# EAGLE board CONTROL PROJECT (EAGLE 9.6.2)
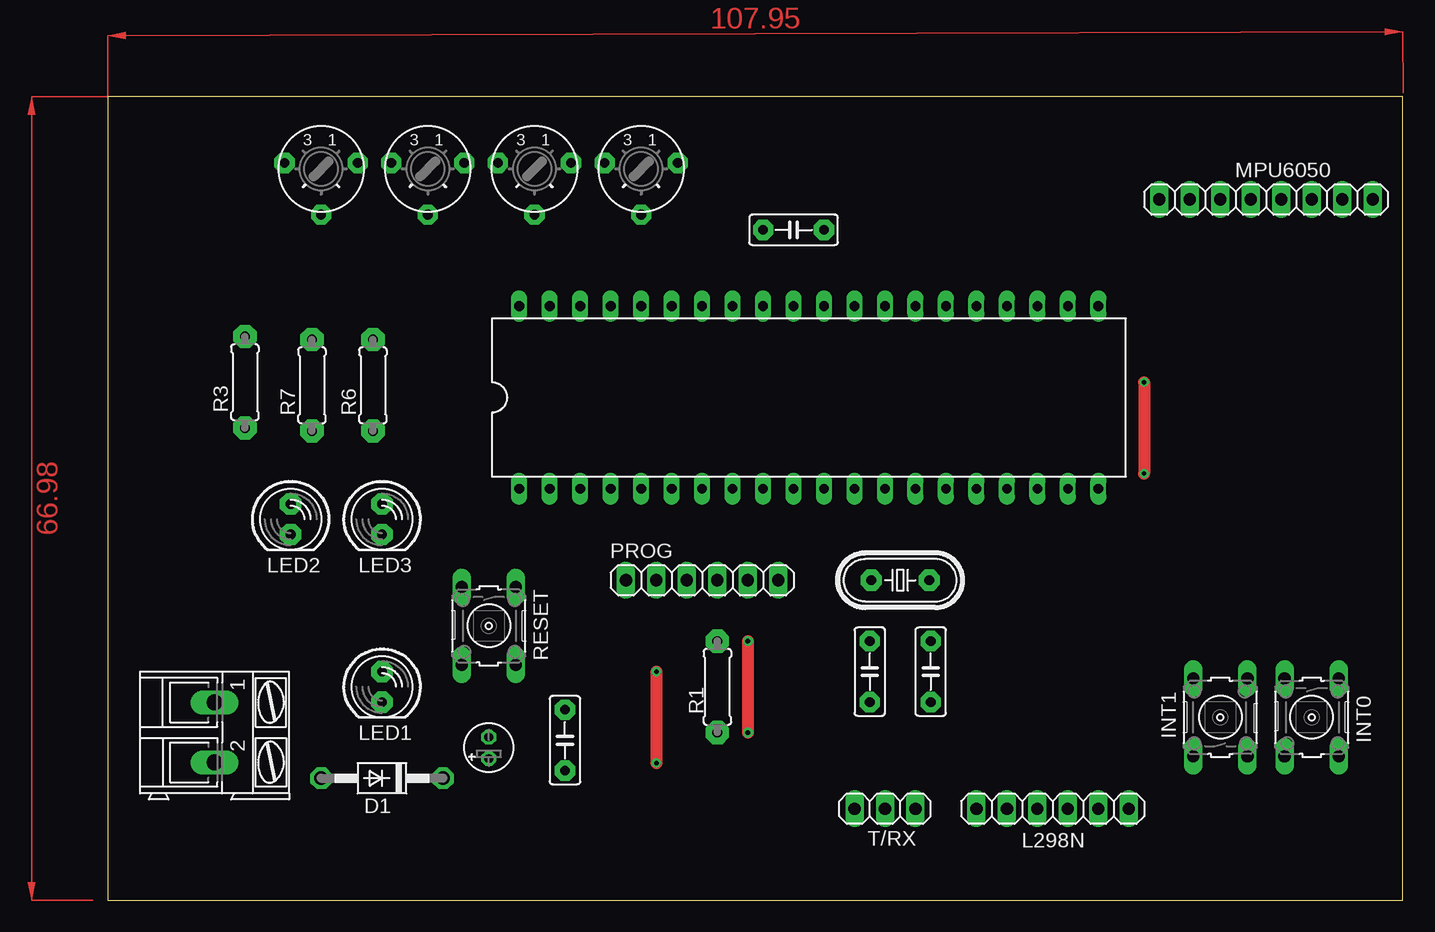
[diagram p0: board, top side]
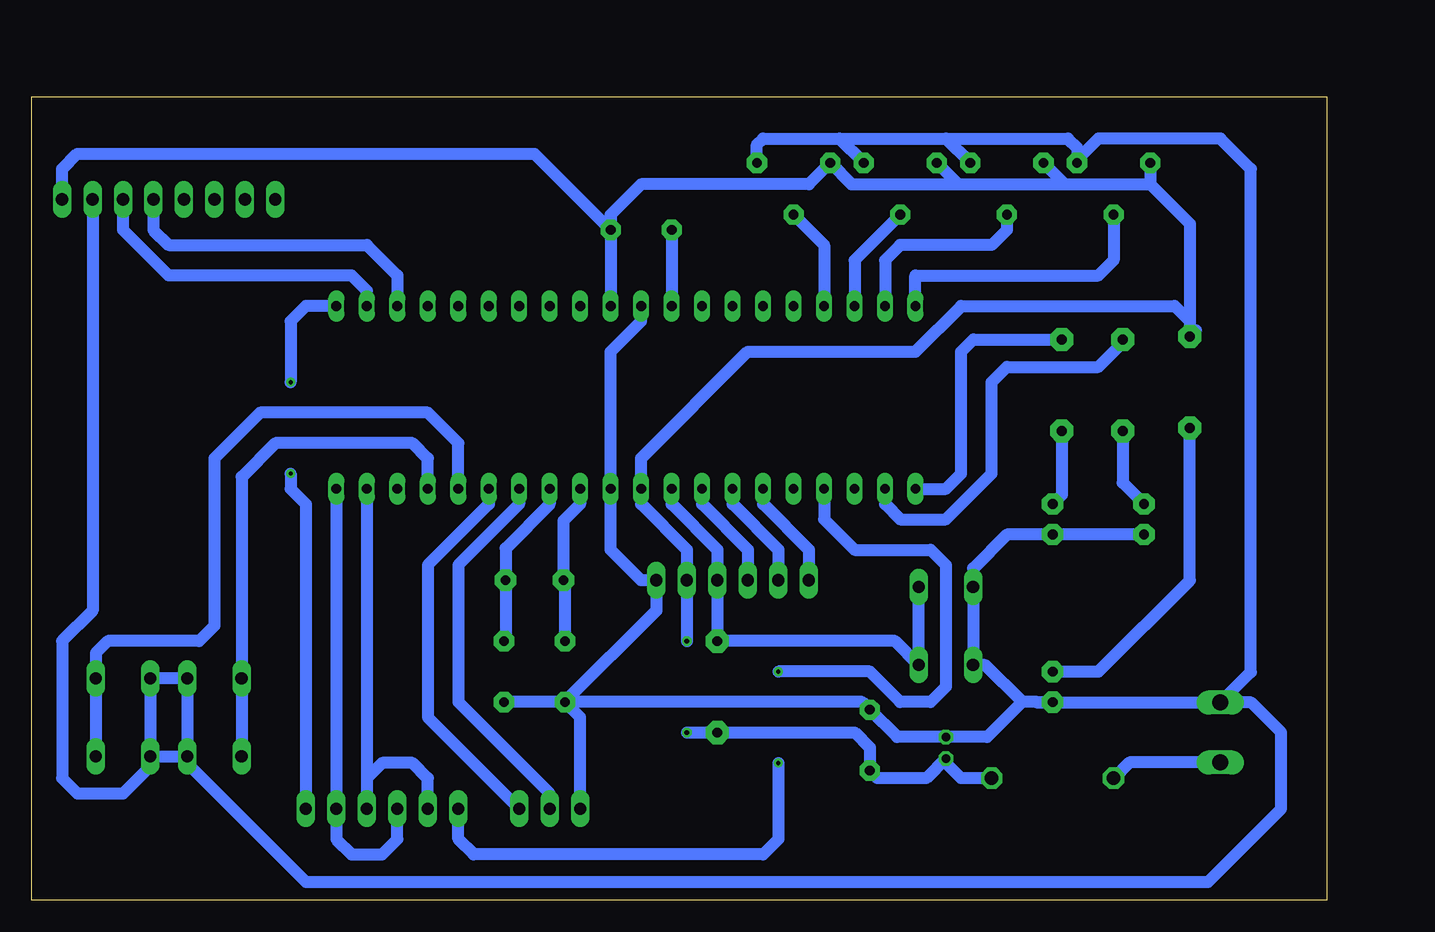
[diagram p1: board, bottom side, seen from below]

Size 107.93 x 66.98 mm. Coordinates in mm from the lower left corner, seen from the top.
Outline: 0,0 107.93,0 107.93,66.98 0,66.98 0,0
Copper layers (1*16): Top 0.035mm / dielectric 1.5mm / Bottom 0.035mm
Design rules "default": minimum track width 6mil, minimum drill 0.35mm, track to track 6mil, track to pad 6mil, pad to pad 6mil, via to via 6mil, smd to smd 6mil, copper to edge 40mil, drill to drill 6mil, minimum pad ring 10mil, minimum via ring 8mil, stop-mask expansion 4mil, vias tented up to drill 0mil, thermal gap 10mil

## Footprints (pad centres in the part's own frame; a part is rotated, then mirrored left to right if it is on the bottom)
C050-025X075 = drill 0.813 pad 1.676 octagon: 1 -2.54,0; 2 2.54,0
E1,8-4 = drill 0.711 pad 1.168 octagon: + -0.889,0; - 0.889,0
DO41-10 = drill 1.118 pad 1.778 octagon: A 5.08,0; C -5.08,0
DIL40 = drill 0.813 long: 1 -24.13,-7.62; 2 -21.59,-7.62; 3 -19.05,-7.62; 4 -16.51,-7.62; 5 -13.97,-7.62; 6 -11.43,-7.62; 7 -8.89,-7.62; 8 -6.35,-7.62; 9 -3.81,-7.62; 10 -1.27,-7.62; 11 1.27,-7.62; 12 3.81,-7.62; 13 6.35,-7.62; 14 8.89,-7.62; 15 11.43,-7.62; 16 13.97,-7.62; 17 16.51,-7.62; 18 19.05,-7.62; 19 21.59,-7.62; 20 24.13,-7.62; 21 24.13,7.62; 22 21.59,7.62; 23 19.05,7.62; 24 16.51,7.62; 25 13.97,7.62; 26 11.43,7.62; 27 8.89,7.62; 28 6.35,7.62; 29 3.81,7.62; 30 1.27,7.62; 31 -1.27,7.62; 32 -3.81,7.62; 33 -6.35,7.62; 34 -8.89,7.62; 35 -11.43,7.62; 36 -13.97,7.62; 37 -16.51,7.62; 38 -19.05,7.62; 39 -21.59,7.62; 40 -24.13,7.62
B3F-10XX = drill 1.016 long: 1 -3.251,2.261; 2 3.251,2.261; 3 -3.251,-2.261; 4 3.251,-2.261
1X06 = drill 1.016 long: 1 -6.35,0; 2 -3.81,0; 3 -1.27,0; 4 1.27,0; 5 3.81,0; 6 6.35,0
LED5MM = drill 0.813 pad 1.778 octagon: A -1.27,0; K 1.27,0
1X08 = drill 1.016 long: 1 -8.89,0; 2 -6.35,0; 3 -3.81,0; 4 -1.27,0; 5 1.27,0; 6 3.81,0; 7 6.35,0; 8 8.89,0
HC49U-V = drill 0.813 pad 1.778 octagon: 1 -2.413,0; 2 2.413,0
0207/7 = drill 0.813 pad 1.93 octagon: 1 -3.81,0; 2 3.81,0
RJ6 = drill 0.813 pad 1.676 octagon: A -3.048,-0.508; E 3.048,-0.508; S 0,3.81
1X03 = drill 1.016 long: 1 -2.54,0; 2 0,0; 3 2.54,0
AK300/2 = drill 1.321 long: 1 -2.515,0; 2 2.489,0

## Placement (x,y rotation side)
C2  22uf  [C050-025X075]  63.5,19.05 90 top
C3  22uf  [C050-025X075]  68.58,19.05 90 top
C4  25uf  [E1,8-4]  31.75,12.7 90 top
C5  100nf  [C050-025X075]  38.1,13.34 270 top
C6  100nf  [C050-025X075]  57.15,55.88 180 top
D1  1N4004  [DO41-10]  22.86,10.16 180 top
IC1  MEGA32-P  [DIL40]  58.42,41.91 0 top
INT0  [B3F-10XX]  100.33,15.24 270 top
INT1  [B3F-10XX]  92.71,15.24 90 top
L298N  [1X06]  78.74,7.62 0 top
LED1  [LED5MM]  22.86,17.78 270 top
LED2  [LED5MM]  15.24,31.75 270 top
LED3  [LED5MM]  22.86,31.75 270 top
MPU6050  [1X08]  96.52,58.42 0 top
PROG  [1X06]  49.53,26.67 0 top
Q1  [HC49U-V]  66.04,26.67 180 top
R1  10k  [0207/7]  50.8,17.78 270 top
R2  [RJ6]  17.78,60.96 180 top
R3  [0207/7]  11.43,43.18 90 top
R4  [RJ6]  26.67,60.96 180 top
R5  [RJ6]  35.56,60.96 180 top
R6  [0207/7]  22.1,42.93 90 top
R7  [0207/7]  17.02,42.93 90 top
R8  [RJ6]  44.45,60.96 180 top
RESET  [B3F-10XX]  31.75,22.86 270 top
T/RX  [1X03]  64.77,7.62 180 top
X1  [AK300/2]  8.89,13.97 270 top

## Library data of the parts
C2 C3 C5 C6 R1 R3 R6 R7 = rcl
C4 = resistor
D1 = diode
IC1 = atmel; MPN: ATMEGA32-16PU; OC_FARNELL: 1661729; OC_NEWARK: 51P1794
INT0 INT1 RESET = switch-omron; MPN: B3F-1000; OC_FARNELL: 176432; OC_NEWARK: 36M3542
L298N MPU6050 PROG T/RX = pinhead
LED1-LED3 = led
Q1 = crystal; OC_FARNELL: 1666969; OC_NEWARK: unknown
R2 R4 R5 R8 = pot
X1 = con-ptr500; OC_FARNELL: unknown; OC_NEWARK: unknown

## Nets
A0: IC1.40 R2.S
A1: IC1.39 R4.S
A2: IC1.38 R5.S
A3: IC1.37 R8.S
AREF: C6.2 IC1.32
GND: C2.1 C3.1 C4.- C5.1 IC1.11 IC1.31 INT0.3 INT0.4 INT1.3 INT1.4 LED1.K LED2.K LED3.K MPU6050.7 PROG.6 R2.A R4.A R5.A R8.A RESET.3 RESET.4 T/RX.3 X1.1
IN0: IC1.16 INT0.1 INT0.2
IN1: IC1.17 INT1.1 INT1.2
MISO: IC1.7 PROG.2
MOSI: IC1.6 PROG.1
N$1: IC1.22 MPU6050.6
N$2: C2.2 IC1.12 Q1.2
N$3: C3.2 IC1.13 Q1.1
N$4: IC1.2 R7.2
N$5: LED1.A R3.1
N$6: D1.A X1.2
N$7: IC1.1 R6.2
N$8: LED3.A R6.1
N$9: LED2.A R7.1
N$12: IC1.19 L298N.2 L298N.4
N$13: IC1.23 MPU6050.5
N$14: IC1.20 L298N.3 L298N.5
N$18: IC1.8 PROG.3
OC0: IC1.4 L298N.1
OC2: IC1.21 L298N.6
RESET: IC1.9 PROG.4 R1.1 RESET.1 RESET.2
RX: IC1.14 T/RX.2
TX: IC1.15 T/RX.1
VCC: C4.+ C5.2 C6.1 D1.C IC1.10 IC1.30 MPU6050.8 PROG.5 R1.2 R2.E R3.2 R4.E R5.E R8.E

## Tracks (layer width: path | path; a pad name or v marks a point on that pad's centre or on a via)
A0
  Bottom 1.016: R2.S 17.78,53.34 19.05,52.07 34.29,52.07 IC1.40
A1
  Bottom 1.016: R4.S 26.67,55.88 27.94,54.61 35.56,54.61 36.83,53.34 IC1.39
A2
  Bottom 1.016: R5.S 39.37,53.34 IC1.38
A3
  Bottom 1.016: R8.S 41.91,54.61 IC1.37
AREF
  Bottom 1.016: C6.2 IC1.32
GND
  Bottom 1.016: R8.A 47.5,62.99 46.99,63.5 40.64,63.5 | 40.64,63.5 31.75,63.5 | 31.75,63.5 21.59,63.5 20.83,62.74 R2.A 20.83,61.72 19.05,63.5 8.89,63.5 6.35,60.96 6.35,19.02 X1.1 | R4.A 31.75,63.5 | R5.A 40.64,63.5 | 24.13,16.51 25.4,16.51 | 24.13,16.51 LED1.K | LED2.K LED3.K 26.67,30.48 29.49,27.66 RESET.3 RESET.4 28.5,19.61 25.4,16.51 | C2.1 C3.1 | IC1.31 57.15,48.26 59.69,45.72 IC1.11 59.69,29.21 57.15,26.67 PROG.6 55.88,24.13 C2.1 | T/RX.3 62.23,15.24 C2.1 | 95.25,12.7 94.97,12.98 INT1.4 INT0.3 INT0.4 | MPU6050.7 102.87,24.13 105.41,21.59 105.41,10.16 104.14,8.89 100.33,8.89 98.07,11.15 INT0.4 | 24.13,16.51 24.11,16.48 X1.1 | 8.87,16.48 X1.1 | C2.1 38.73,16.51 C5.1 35.81,13.59 C4.- 28.32,13.59 25.4,16.51 | INT0.4 INT1.3 95.25,11.99 95.25,11.68 85.09,1.52 9.91,1.52 3.81,7.62 3.81,13.97 6.32,16.48 X1.1
IN0
  Bottom 1.016: IC1.16 72.39,38.1 74.93,40.64 88.9,40.64 92.71,36.83 92.71,22.86 93.98,21.59 101.6,21.59 102.59,20.6 INT0.1 INT0.2
IN1
  Bottom 1.016: IC1.17 74.93,36.83 76.2,38.1 87.63,38.1 90.45,35.28 INT1.2 INT1.1
MISO
  Bottom 1.016: IC1.7 49.53,33.02 45.72,29.21 PROG.2
MOSI
  Bottom 1.016: IC1.6 46.99,33.02 43.18,29.21 PROG.1
N$1
  Bottom 1.016: IC1.22 80.01,50.8 81.28,52.07 96.52,52.07 100.33,55.88 MPU6050.6
N$2
  Bottom 1.016: IC1.12 62.23,33.02 63.63,31.62 Q1.2 63.5,26.54 C2.2
N$3
  Bottom 1.016: IC1.13 64.77,33.02 68.45,29.34 Q1.1 68.45,21.72 C3.2
N$4
  Bottom 1.016: IC1.2 36.83,33.02 35.56,31.75 31.75,31.75 27.94,35.56 27.94,43.18 26.67,44.45 19.05,44.45 17.02,46.48 R7.2
N$5
  Bottom 1.016: R3.1 11.43,26.67 19.05,19.05 LED1.A
N$6
  Bottom 1.016: X1.2 16.46,11.48 D1.A
N$7
  Bottom 1.016: IC1.1 31.75,34.29 30.48,35.56 30.48,45.72 29.46,46.74 R6.2
N$8
  Bottom 1.016: R6.1 22.1,33.78 LED3.A
N$9
  Bottom 1.016: R7.1 17.02,34.8 LED2.A
N$12
  Bottom 1.016: IC1.19 80.01,11.43 80.01,10.16 | 80.01,10.16 L298N.4 | L298N.2 74.93,10.16 76.2,11.43 78.74,11.43 80.01,10.16
N$13
  Bottom 1.016: MPU6050.5 97.79,55.88 96.52,54.61 80.01,54.61 77.47,52.07 IC1.23
N$14
  Bottom 1.016: IC1.20 L298N.5 82.55,5.08 81.28,3.81 78.74,3.81 77.47,5.08 L298N.3
N$18
  Bottom 1.016: IC1.8 52.07,33.02 48.26,29.21 PROG.3
OC0  (via drill 0.35)
  Top 1.016: v45.72,19.05 v45.72,11.43
  Bottom 1.016: v45.72,19.05 38.1,19.05 35.56,16.51 33.02,16.51 31.75,17.78 31.75,27.94 33.02,29.21 39.37,29.21 41.91,31.75 IC1.4 | v45.72,11.43 45.72,5.08 46.99,3.81 71.12,3.81 72.39,5.08 L298N.1
OC2  (via drill 0.35)
  Top 1.016: v86.36,43.18 v86.36,35.56
  Bottom 1.016: IC1.21 85.09,49.53 86.36,48.26 v86.36,43.18 | v86.36,35.56 86.36,34.29 85.09,33.02 L298N.6
RESET
  Bottom 1.016: IC1.9 54.61,33.02 50.8,29.21 PROG.4 R1.1 35.99,21.59 RESET.2 RESET.1
RX
  Bottom 1.016: IC1.14 67.31,33.02 72.39,27.94 72.39,16.51 64.77,8.89 T/RX.2
TX
  Bottom 1.016: IC1.15 69.85,33.02 74.93,27.94 74.93,15.24 T/RX.1
VCC  (via drill 0.4)
  Top 1.016: v53.34,21.59 v53.34,13.97
  Bottom 1.016: R2.E 14.73,59.69 | 10.92,47.5 R3.2 | R4.E 21.84,59.69 | 21.84,59.69 14.73,59.69 | R5.E 30.73,59.69 | 30.73,59.69 21.84,59.69 | C6.1 IC1.30 | C6.1 59.69,57.15 57.15,59.69 43.18,59.69 R8.E 39.62,59.69 30.73,59.69 | D1.C 30.48,10.16 31.75,11.43 C4.+ 33.4,10.16 37.46,10.16 C5.2 38.1,12.7 39.37,13.97 R1.2 v53.34,13.97 | MPU6050.8 105.41,60.96 104.14,62.23 66.04,62.23 C6.1 | v53.34,21.59 PROG.5 53.34,29.21 57.15,33.02 IC1.10 57.15,36.83 48.26,45.72 34.29,45.72 30.48,49.53 12.7,49.53 11.43,48.26 R3.2 | 14.73,59.69 11.43,56.39 R3.2
(copper drawn outside any net)
  shapes: Top area x2